# EAGLE board ES Project Public Parking (EAGLE 9.7.0)

Size 574.16 x 242.62 mm. Coordinates in mm from the lower left corner, seen from the top.
Outline: 0,0 574.16,0 574.16,242.62 0,242.62 0,0
Copper layers (1*16): Top 0.035mm / dielectric 1.5mm / Bottom 0.035mm
Design rules "default": minimum track width 6mil, minimum drill 0.35mm, track to track 6mil, track to pad 6mil, pad to pad 6mil, via to via 6mil, smd to smd 6mil, copper to edge 40mil, drill to drill 6mil, minimum pad ring 10mil, minimum via ring 8mil, stop-mask expansion 4mil, vias tented up to drill 0mil, thermal gap 10mil

## Footprints (pad centres in the part's own frame; a part is rotated, then mirrored left to right if it is on the bottom)
LEDRD254W60D565H860B = drill 0.981 pad 1.581: 1 -1.27,0; 2 1.27,0
LEDRD254W60D565H860B_G = drill 0.981 pad 1.581: 1 -1.27,0; 2 1.27,0
RESAD1016W63L850D250B = drill 0.83 pad 1.43: 1 -5.08,0; 2 5.08,0
HA-06-SM065 = drill 1 pad 1.676: 1 -2.54,-2.54; 2 0,2.54; 3 2.54,-2.54
SWITCH-MOMENTARY-PTH-6.5MM = drill 1.016 pad 1.88: 1 -3.251,2.261; 2 3.251,2.261; 3 -3.251,-2.261; 4 3.251,-2.261
ARDUINO-UNO-R3-SHIELD = drill 1.016 pad 1.88: 3.3V 24.13,-2.54; 5V 24.13,0; A0 24.13,12.7; A1 24.13,15.24; A2 24.13,17.78; A3 24.13,20.32; A4 24.13,22.86; A5 24.13,25.4; AREF -24.13,-13.97; D2 -24.13,20.32; D3 -24.13,17.78; D4 -24.13,15.24; D5 -24.13,12.7; D6 -24.13,10.16; D7 -24.13,7.62; D8 -24.13,3.81; D9 -24.13,1.27; D10 -24.13,-1.27; D11 -24.13,-3.81; D12 -24.13,-6.35; D13 -24.13,-8.89; GND@0 24.13,2.54; GND@1 24.13,5.08; GND@2 -24.13,-11.43; IOREF 24.13,-7.62; NC 24.13,-10.16; RES 24.13,-5.08; RX -24.13,25.4; SCL -24.13,-19.05; SDA -24.13,-16.51; TX -24.13,22.86; VIN 24.13,7.62
JHD-162A = drill 1.016 long: 1 -19.05,0; 2 -16.51,0; 3 -13.97,0; 4 -11.43,0; 5 -8.89,0; 6 -6.35,0; 7 -3.81,0; 8 -1.27,0; 9 1.27,0; 10 3.81,0; 11 6.35,0; 12 8.89,0; 13 11.43,0; 14 13.97,0; 15 16.51,0; 16 19.05,0
TSOP48 = drill 0.8: 1 -2.54,0; 2 0,0; 3 2.54,0

## Placement (x,y rotation side)
D1  RED  [LEDRD254W60D565H860B]  486.61,156.36 180 top
D2  RED  [LEDRD254W60D565H860B]  482.41,17.44 180 top
D3  RED  [LEDRD254W60D565H860B]  223.68,234.09 180 top
D4  RED  [LEDRD254W60D565H860B]  60.54,234.71 180 top
D5  GREEN  [LEDRD254W60D565H860B_G]  205.9,234.09 180 top
D6  GREEN  [LEDRD254W60D565H860B_G]  42.76,234.71 180 top
D7  RED  [LEDRD254W60D565H860B]  221.19,94.61 180 top
D8  GREEN  [LEDRD254W60D565H860B_G]  203.41,94.61 180 top
D9  RED  [LEDRD254W60D565H860B]  58.05,92.74 180 top
D10  GREEN  [LEDRD254W60D565H860B_G]  40.27,92.74 180 top
R1  1k  [RESAD1016W63L850D250B]  459.94,153.82 180 top
R2  220  [RESAD1016W63L850D250B]  526.04,196.76 180 top
R3  1k  [RESAD1016W63L850D250B]  492.96,153.82 0 top
R4  220  [RESAD1016W63L850D250B]  521.88,57.51 180 top
R5  1k  [RESAD1016W63L850D250B]  488.76,14.9 0 top
R6  1k  [RESAD1016W63L850D250B]  458.28,14.9 180 top
R7  1k  [RESAD1016W63L850D250B]  212.25,234.09 0 top
R8  1k  [RESAD1016W63L850D250B]  230.03,234.09 0 top
R9  1k  [RESAD1016W63L850D250B]  66.89,234.71 0 top
R10  1k  [RESAD1016W63L850D250B]  49.11,234.71 0 top
R11  1k  [RESAD1016W63L850D250B]  227.54,94.61 0 top
R12  1k  [RESAD1016W63L850D250B]  209.76,94.61 0 top
R13  1k  [RESAD1016W63L850D250B]  64.39,92.74 0 top
R14  1k  [RESAD1016W63L850D250B]  46.62,92.74 0 top
RPOT1  250k  [HA-06-SM065]  518.36,171.6 0 top
RPOT2  250k  [HA-06-SM065]  511.62,32.68 0 top
S1  SWITCH_MOMENTARY  [SWITCH-MOMENTARY-PTH-6.5MM]  467.56,160.17 90 top
S2  SWITCH_MOMENTARY  [SWITCH-MOMENTARY-PTH-6.5MM]  465.9,21.25 90 top
U1  ARDUINO-UNO-R3-SHIELD  [ARDUINO-UNO-R3-SHIELD]  411.61,169.44 270 top
U2  ARDUINO-UNO-R3-SHIELD  [ARDUINO-UNO-R3-SHIELD]  407.33,29.84 270 top
U3  LCD-16X2JHD-162A  [JHD-162A]  516.16,233.16 0 top
U4  LCD-16X2JHD-162A  [JHD-162A]  518.53,95.26 0 top
U5  ARDUINO-UNO-R3-SHIELD  [ARDUINO-UNO-R3-SHIELD]  213.52,171.86 270 top
U7  ARDUINO-UNO-R3-SHIELD  [ARDUINO-UNO-R3-SHIELD]  210.76,31.84 270 top
U8  ARDUINO-UNO-R3-SHIELD  [ARDUINO-UNO-R3-SHIELD]  49.84,172.48 270 top
U9  ARDUINO-UNO-R3-SHIELD  [ARDUINO-UNO-R3-SHIELD]  47.88,30.51 270 top
U10  IR-RECEIVERTSOP48  [TSOP48]  252.89,234.09 0 top
U11  IR-RECEIVERTSOP48  [TSOP48]  89.75,234.71 0 top
U12  IR-RECEIVERTSOP48  [TSOP48]  250.4,94.61 0 top
U13  IR-RECEIVERTSOP48  [TSOP48]  87.25,92.74 0 top

## Library data of the parts
D1-D4 D7 D9 = Tinkercad; CATEGORY: Opto-Electronic; SUB-CATEGORY: LED; VALUE: LED_RED
D5 D6 D8 D10 = Tinkercad; CATEGORY: Opto-Electronic; SUB-CATEGORY: LED; VALUE: LED_GREEN
R1-R14 RPOT1 RPOT2 S1 S2 U1-U5 U7-U13 = Tinkercad

## Nets
D1_A: D1.1 R3.1
D2_A: D2.1 R5.1
D3_A: D3.1 R8.1
D4_A: D4.1 R9.1
D5_A: D5.1 R7.1
D6_A: D6.1 R10.1
D7_A: D7.1 R11.1
D8_A: D8.1 R12.1
D9_A: D9.1 R13.1
D10_A: D10.1 R14.1
U1_5V: RPOT1.3 S1.3 S1.4 U1.5V U3.2 U3.15
U1_A0: RPOT1.2 U1.A0
U1_A4: U1.A4 U2.A4
U1_D2: U1.D2 U3.14
U1_D3: U1.D3 U3.13
U1_D4: U1.D4 U3.12
U1_D5: U1.D5 U3.11
U1_D6: U1.D6 U3.6
U1_D7: U1.D7 U3.4
U1_D8: R1.1 S1.1 S1.2 U1.D8
U1_D9: R3.2 U1.D9
U1_GND: D1.2 D2.2 R1.2 R2.2 R4.2 R6.2 RPOT1.1 RPOT2.1 U1.GND@0 U1.GND@1 U1.GND@2 U2.GND@0 U2.GND@1 U2.GND@2 U3.1 U3.3 U3.5 U4.1 U4.3 U4.5
U2_5V: RPOT2.3 S2.3 S2.4 U2.5V U4.2 U4.15
U2_A0: RPOT2.2 U2.A0
U2_A5: U1.A5 U2.A5
U2_D2: U2.D2 U4.14
U2_D3: U2.D3 U4.13
U2_D4: U2.D4 U4.12
U2_D5: U2.D5 U4.11
U2_D6: U2.D6 U4.6
U2_D7: U2.D7 U4.4
U2_D8: R6.1 S2.1 S2.2 U2.D8
U2_D9: R5.2 U2.D9
U3_LED-: R2.1 U3.16
U4_LED-: R4.1 U4.16
U5_5V: U5.5V U10.3
U5_D2: U5.D2 U10.1
U5_D3: R8.2 U5.D3
U5_D4: R7.2 U5.D4
U5_GND: D3.2 D5.2 U5.GND@0 U5.GND@1 U5.GND@2 U10.2
U7_5V: U7.5V U12.3
U7_D2: U7.D2 U12.1
U7_D3: R11.2 U7.D3
U7_D4: R12.2 U7.D4
U7_GND: D7.2 D8.2 U7.GND@0 U7.GND@1 U7.GND@2 U12.2
U8_5V: U8.5V U11.3
U8_D2: U8.D2 U11.1
U8_D3: R9.2 U8.D3
U8_D4: R10.2 U8.D4
U8_GND: D4.2 D6.2 U8.GND@0 U8.GND@1 U8.GND@2 U11.2
U9_5V: U9.5V U13.3
U9_D2: U9.D2 U13.1
U9_D3: R13.2 U9.D3
U9_D4: R14.2 U9.D4
U9_GND: D9.2 D10.2 U9.GND@0 U9.GND@1 U9.GND@2 U13.2

## Tracks (layer width: path | path; a pad name or v marks a point on that pad's centre or on a via)
D1_A  (1 unrouted)
D2_A  (1 unrouted)
D3_A  (1 unrouted)
D4_A  (1 unrouted)
D5_A  (1 unrouted)
D6_A  (1 unrouted)
D7_A  (1 unrouted)
D8_A  (1 unrouted)
D9_A  (1 unrouted)
D10_A  (1 unrouted)
U1_5V  (5 unrouted)
U1_A0  (1 unrouted)
U1_A4  (1 unrouted)
U1_D2  (1 unrouted)
U1_D3  (1 unrouted)
U1_D4  (1 unrouted)
U1_D5  (1 unrouted)
U1_D6  (1 unrouted)
U1_D7  (1 unrouted)
U1_D8  (3 unrouted)
U1_D9  (1 unrouted)
U1_GND  (19 unrouted)
U2_5V  (5 unrouted)
U2_A0  (1 unrouted)
U2_A5  (1 unrouted)
U2_D2  (1 unrouted)
U2_D3  (1 unrouted)
U2_D4  (1 unrouted)
U2_D5  (1 unrouted)
U2_D6  (1 unrouted)
U2_D7  (1 unrouted)
U2_D8  (3 unrouted)
U2_D9  (1 unrouted)
U3_LED-  (1 unrouted)
U4_LED-  (1 unrouted)
U5_5V  (1 unrouted)
U5_D2  (1 unrouted)
U5_D3  (1 unrouted)
U5_D4  (1 unrouted)
U5_GND  (5 unrouted)
U7_5V  (1 unrouted)
U7_D2  (1 unrouted)
U7_D3  (1 unrouted)
U7_D4  (1 unrouted)
U7_GND  (5 unrouted)
U8_5V  (1 unrouted)
U8_D2  (1 unrouted)
U8_D3  (1 unrouted)
U8_D4  (1 unrouted)
U8_GND  (5 unrouted)
U9_5V  (1 unrouted)
U9_D2  (1 unrouted)
U9_D3  (1 unrouted)
U9_D4  (1 unrouted)
U9_GND  (5 unrouted)